# Altium PCB Demo_v1_2.PcbDoc (part 2 of 2)
Units mil, origin at the board's own origin, x right, y up, seen from the top; angles counter-clockwise.
Board outline 4921.26 x 5610.24 mil, 2 copper layers (Top Layer, Bottom Layer); 188 components, 170 nets, 730 pads, 115 vias.
Unrouted connection lines stored in the file: 12.
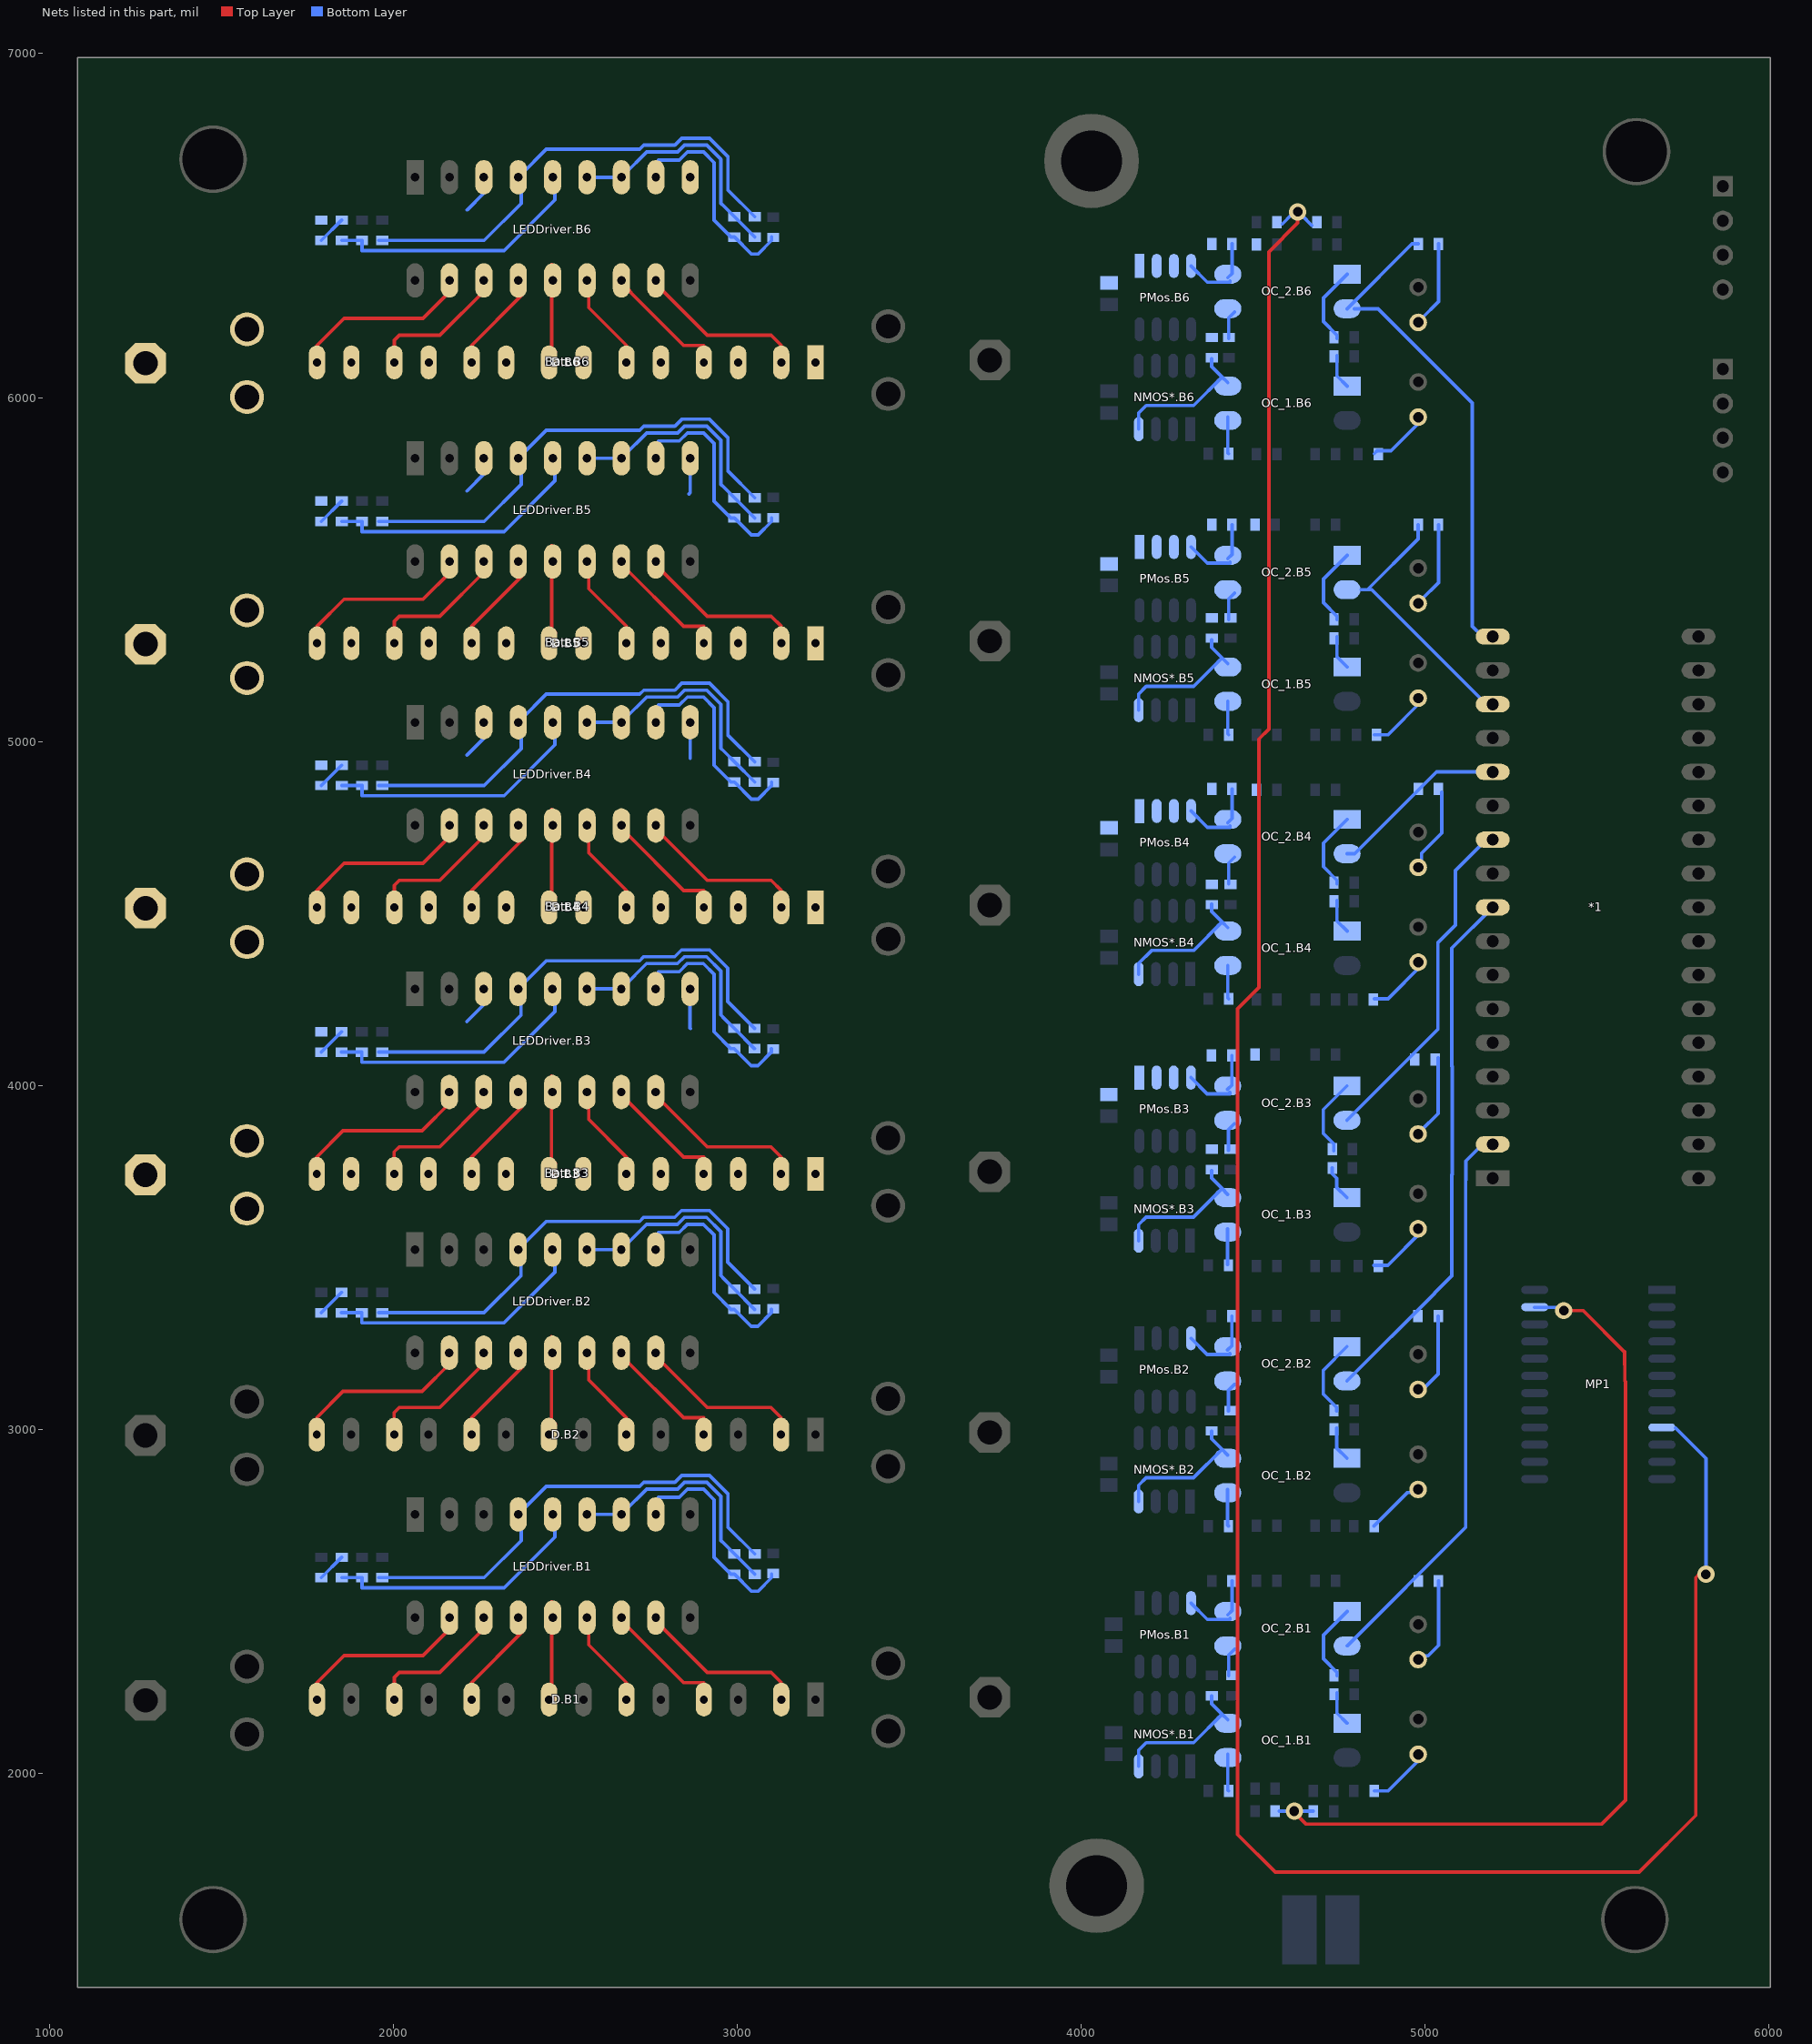
[diagram p2: the nets of this part, all layers, seen from the top]

## Via types
v1: diameter 50, hole 28, Top Layer to Bottom Layer, 115 vias

## Nets (pads, with @x,y where several pads share a name; then routed paths per layer and width w, separated by ;. In a path a pad name is that pad's centre, name@x,y a point inside that pad or via, vN(x,y) a via of type N, cw(c..) or ccw(c..) an arc to the next point about the centre after c; other vN are vias at no path point) (continued)
NetBatt.B3_P: Batt.B3.P C1.B3.2 D.B3.1 D.B3.3 D.B3.5 D.B3.7 D.B3.9 D.B3.11 D.B3.13 LEDDriver.B3.3 LEDDriver.B3.9 PMos.B3.1 R1.B3.2 R2.B3.2 R7.B3.1 R11.B3.2 | length 231.9
  Bottom Layer w10: 2214.17,4185.53 2263.31,4234.66 LEDDriver.B3.3@2263.31,4280.69 ; LEDDriver.B3.9@2863.31,4280.69 2863.31,4166.69 2865,4165
NetBatt.B4_P: Batt.B4.P C1.B4.2 D.B4.1 D.B4.3 D.B4.5 D.B4.7 D.B4.9 D.B4.11 D.B4.13 LEDDriver.B4.3 LEDDriver.B4.9 PMos.B4.1 R1.B4.2 R2.B4.2 R7.B4.1 R11.B4.2 | length 220
  Bottom Layer w10: 2214.57,4960.63 2263.7,5009.76 LEDDriver.B4.3@2263.7,5055.79 ; 2863.7,4951.3 LEDDriver.B4.9@2863.7,5055.79
NetBatt.B5_P: Batt.B5.P C1.B5.2 D.B5.1 D.B5.3 D.B5.5 D.B5.7 D.B5.9 D.B5.11 D.B5.13 LEDDriver.B5.3 LEDDriver.B5.9 PMos.B5.1 R1.B5.2 R2.B5.2 R7.B5.1 R11.B5.2 | length 220.5
  Bottom Layer w10: 2214.57,5728.35 2263.7,5777.48 LEDDriver.B5.3@2263.7,5823.5 ; 2860,5720 2863.7,5723.7 LEDDriver.B5.9@2863.7,5823.5
NetBatt.B6_P: Batt.B6.P C1.B6.2 D.B6.1 D.B6.3 D.B6.5 D.B6.7 D.B6.9 D.B6.11 D.B6.13 LEDDriver.B6.3 LEDDriver.B6.9 PMos.B6.1 R1.B6.2 R2.B6.2 R7.B6.1 R11.B6.2 | length 115.5
  Bottom Layer w10: 2214.57,6545.28 2263.7,6594.41 LEDDriver.B6.3@2263.7,6640.43
NetD1.B1_2: D1.B1.2 R22.B1.2 | length 248.8
  Bottom Layer w10: D1.B1.2@4990.16,2341.73 5009.06,2341.73 5039.37,2372.05 R22.B1.2@5039.37,2559.05
NetD1.B2_2: D1.B2.2 R22.B2.2 | length 237.7
  Bottom Layer w10: D1.B2.2@4989.76,3111.91 5038.34,3160.48 5038.34,3328.59 R22.B2.2@5038.98,3329.23
NetD1.B3_2: D1.B3.2 R22.B3.2 | length 229.9
  Bottom Layer w10: D1.B3.2@4989.76,3869.78 5038.11,3918.13 R22.B3.2@5038.11,4079.66
NetD1.B4_2: D1.B4.2 R22.B4.2 | length 232.3
  Bottom Layer w10: D1.B4.2@4990.16,4644.88 4990.16,4675.2 5048.59,4733.63 R22.B4.2@5048.59,4852.98
NetD1.B5_2: D1.B5.2 R22.B5.2 | length 237.7
  Bottom Layer w10: D1.B5.2@4990.16,5412.6 5039.37,5461.81 R22.B5.2@5039.37,5629.92
NetD1.B6_2: D1.B6.2 R22.B6.2 | length 237.7
  Bottom Layer w10: D1.B6.2@4990.16,6229.53 5039.37,6278.74 R22.B6.2@5039.37,6446.85
NetD2.B1_2: D2.B1.2 R23.B1.2 | length 178.2
  Bottom Layer w10: R23.B1.2@4852.36,1948.82 4892.52,1948.82 D2.B1.2@4990.16,2046.46
NetD2.B2_2: D2.B2.2 R23.B2.2 | length 178.2
  Bottom Layer w10: R23.B2.2@4851.97,2719 4949.61,2816.63 D2.B2.2@4989.76,2816.63
NetD2.B3_2: D2.B3.2 R23.B3.2 | length 178.2
  Bottom Layer w10: R23.B3.2@4851.97,3476.87 4892.13,3476.87 D2.B3.2@4989.76,3574.51
NetD2.B4_2: D2.B4.2 R23.B4.2 | length 178.2
  Bottom Layer w10: R23.B4.2@4852.36,4251.97 4892.52,4251.97 D2.B4.2@4990.16,4349.61
NetD2.B5_2: D2.B5.2 R23.B5.2 | length 178.2
  Bottom Layer w10: R23.B5.2@4852.36,5019.69 4892.52,5019.69 D2.B5.2@4990.16,5117.32
NetD2.B6_2: D2.B6.2 R23.B6.2 | length 178.2
  Bottom Layer w10: R23.B6.2@4852.36,5836.61 4861.42,5845.67 4901.57,5845.67 D2.B6.2@4990.16,5934.25
NetD.B1_2: D.B1.2 LEDDriver.B1.11 | length 494.5
  Top Layer w10: LEDDriver.B1.11@2762.2,2424.8 2762.2,2452.64 LEDDriver.B1.11@2762.2,2480.79 ; LEDDriver.B1.11@2763.98,2442.72 2913.39,2293.31 3098.82,2293.31 3128.35,2263.78
NetD.B1_4: D.B1.4 LEDDriver.B1.12 | length 327.4
  Top Layer w10: LEDDriver.B1.12@2663.7,2452.64 2663.7,2436.3 2675,2425 2683.27,2425 2844.49,2263.78 2903.35,2263.78
NetD.B1_6: D.B1.6 LEDDriver.B1.13 | length 252
  Top Layer w10: LEDDriver.B1.13@2568.9,2470.47 2568.9,2452.64 2568.9,2373.23 2678.35,2263.78
NetD.B1_8: D.B1.8 LEDDriver.B1.14 | length 272
  Top Layer w10: LEDDriver.B1.14@2460.63,2498.9 LEDDriver.B1.14@2460.63,2449.68 ; LEDDriver.B1.14@2470.47,2439.84 2460.69,2449.63 LEDDriver.B1.14@2460.63,2449.68 ; D.B1.8@2471.75,2245.37 2460.63,2256.5 LEDDriver.B1.14@2460.63,2449.68
NetD.B1_10: D.B1.10 LEDDriver.B1.15 | length 274.6
  Top Layer w10: 2228.35,2263.78 LEDDriver.B1.15@2374.02,2409.45 ; LEDDriver.B1.15@2362.2,2427.17 2362.2,2452.64 2362.2,2472.44 2372.05,2461.1 LEDDriver.B1.15@2372.05,2452.76
NetD.B1_12: D.B1.12 LEDDriver.B1.16 | length 397.3
  Top Layer w10: 2003.35,2263.78 2003.35,2278.62 2018.03,2293.31 2135.83,2293.31 2267.13,2424.61 2262.2,2429.53 2262.2,2452.64 LEDDriver.B1.16@2262.2,2480.79
NetD.B1_14: D.B1.14 LEDDriver.B1.17 | length 514.5
  Top Layer w10: 1778.35,2263.78 1857.09,2342.52 2086.62,2342.52 2167.13,2423.03 2162.2,2427.95 LEDDriver.B1.17@2162.2,2480.79
NetD.B2_2: D.B2.2 LEDDriver.B2.11 | length 494.5
  Top Layer w10: LEDDriver.B2.11@2761.81,3194.98 2761.81,3222.82 LEDDriver.B2.11@2761.81,3250.97 ; LEDDriver.B2.11@2763.58,3212.89 2912.99,3063.49 3098.42,3063.49 3127.95,3033.96
NetD.B2_4: D.B2.4 LEDDriver.B2.12 | length 384.7
  Top Layer w10: LEDDriver.B2.12@2661.81,3186.71 2661.81,3222.82 2661.81,3245.77 2671.65,3231.28 LEDDriver.B2.12@2671.65,3226.08 ; LEDDriver.B2.12@2671.53,3206.53 2844.09,3033.96 2902.95,3033.96
NetD.B2_6: D.B2.6 LEDDriver.B2.13 | length 252
  Top Layer w10: LEDDriver.B2.13@2568.5,3240.65 2568.5,3222.82 2568.5,3143.41 2677.95,3033.96
NetD.B2_8: D.B2.8 LEDDriver.B2.14 | length 272
  Top Layer w10: LEDDriver.B2.14@2460.24,3269.08 LEDDriver.B2.14@2460.24,3219.86 ; LEDDriver.B2.14@2470.08,3210.02 2460.29,3219.8 LEDDriver.B2.14@2460.24,3219.86 ; D.B2.8@2471.36,3015.55 2460.24,3026.67 LEDDriver.B2.14@2460.24,3219.86
NetD.B2_10: D.B2.10 LEDDriver.B2.15 | length 274.6
  Top Layer w10: 2227.95,3033.96 LEDDriver.B2.15@2373.62,3179.63 ; LEDDriver.B2.15@2361.81,3197.34 2361.81,3222.82 2361.81,3242.62 2371.65,3231.28 LEDDriver.B2.15@2371.65,3222.93
NetD.B2_12: D.B2.12 LEDDriver.B2.16 | length 397.3
  Top Layer w10: 2002.95,3033.96 2002.95,3048.8 2017.64,3063.49 2135.43,3063.49 2266.73,3194.78 2261.81,3199.71 2261.81,3222.82 LEDDriver.B2.16@2261.81,3250.97
NetD.B2_14: D.B2.14 LEDDriver.B2.17 | length 514.5
  Top Layer w10: 1777.95,3033.96 1854.23,3110.24 2083.76,3110.24 2166.73,3193.21 2161.81,3198.13 LEDDriver.B2.17@2161.81,3250.97
NetD.B3_2: D.B3.2 LEDDriver.B3.11 | length 494.5
  Top Layer w10: LEDDriver.B3.11@2761.81,3952.86 2761.81,3980.69 LEDDriver.B3.11@2761.81,4008.84 ; LEDDriver.B3.11@2763.58,3970.77 2912.99,3821.36 3098.42,3821.36 3127.95,3791.83
NetD.B3_4: D.B3.4 LEDDriver.B3.12 | length 358.7
  Top Layer w10: LEDDriver.B3.12@2661.81,3944.59 LEDDriver.B3.12@2661.81,3980.69 ; LEDDriver.B3.12@2663.31,3980.69 2675,3969 2675,3960.93 2844.09,3791.83 2902.95,3791.83
NetD.B3_6: D.B3.6 LEDDriver.B3.13 | length 252
  Top Layer w10: LEDDriver.B3.13@2568.5,3998.52 2568.5,3980.69 2568.5,3901.28 2677.95,3791.83
NetD.B3_8: D.B3.8 LEDDriver.B3.14 | length 272
  Top Layer w10: LEDDriver.B3.14@2460.24,4026.95 LEDDriver.B3.14@2460.24,3977.74 ; LEDDriver.B3.14@2470.08,3967.89 2460.29,3977.68 LEDDriver.B3.14@2460.24,3977.74 ; D.B3.8@2471.36,3773.43 2460.24,3784.55 LEDDriver.B3.14@2460.24,3977.74
NetD.B3_10: D.B3.10 LEDDriver.B3.15 | length 274.6
  Top Layer w10: 2227.95,3791.83 LEDDriver.B3.15@2373.62,3937.5 ; LEDDriver.B3.15@2361.81,3955.22 2361.81,3980.69 2361.81,4000.49 2371.65,3989.15 LEDDriver.B3.15@2371.65,3980.81
NetD.B3_12: D.B3.12 LEDDriver.B3.16 | length 397.3
  Top Layer w10: 2002.95,3791.83 2002.95,3806.67 2017.64,3821.36 2135.43,3821.36 2266.73,3952.66 2261.81,3957.58 2261.81,3980.69 LEDDriver.B3.16@2261.81,4008.84
NetD.B3_14: D.B3.14 LEDDriver.B3.17 | length 514.5
  Top Layer w10: 1777.95,3791.83 1854.23,3868.11 2083.76,3868.11 2166.73,3951.08 2161.81,3956 LEDDriver.B3.17@2161.81,4008.84
NetD.B4_2: D.B4.2 LEDDriver.B4.11 | length 494.5
  Top Layer w10: LEDDriver.B4.11@2762.2,4727.95 2762.2,4755.79 LEDDriver.B4.11@2762.2,4783.94 ; LEDDriver.B4.11@2763.98,4745.87 2913.39,4596.46 3098.82,4596.46 3128.35,4566.93
NetD.B4_4: D.B4.4 LEDDriver.B4.12 | length 387.1
  Top Layer w10: LEDDriver.B4.12@2662.2,4719.69 2662.2,4755.79 2662.2,4778.74 2672.05,4764.25 LEDDriver.B4.12@2672.05,4759.06 ; LEDDriver.B4.12@2677.17,4744.09 2677.17,4734.25 2844.49,4566.93 2903.35,4566.93
NetD.B4_6: D.B4.6 LEDDriver.B4.13 | length 252
  Top Layer w10: LEDDriver.B4.13@2568.9,4773.62 2568.9,4755.79 2568.9,4676.38 2678.35,4566.93
NetD.B4_8: D.B4.8 LEDDriver.B4.14 | length 272
  Top Layer w10: LEDDriver.B4.14@2460.63,4802.05 LEDDriver.B4.14@2460.63,4752.83 ; LEDDriver.B4.14@2470.47,4742.99 2460.69,4752.78 LEDDriver.B4.14@2460.63,4752.83 ; D.B4.8@2471.75,4548.52 2460.63,4559.65 LEDDriver.B4.14@2460.63,4752.83
NetD.B4_10: D.B4.10 LEDDriver.B4.15 | length 274.6
  Top Layer w10: 2228.35,4566.93 LEDDriver.B4.15@2374.02,4712.6 ; LEDDriver.B4.15@2362.2,4730.32 2362.2,4755.79 2362.2,4775.59 2372.05,4764.25 LEDDriver.B4.15@2372.05,4755.91
NetD.B4_12: D.B4.12 LEDDriver.B4.16 | length 397.3
  Top Layer w10: 2003.35,4566.93 2003.35,4581.77 2018.03,4596.46 2135.83,4596.46 2267.13,4727.76 2262.2,4732.68 2262.2,4755.79 LEDDriver.B4.16@2262.2,4783.94
NetD.B4_14: D.B4.14 LEDDriver.B4.17 | length 514.5
  Top Layer w10: 1778.35,4566.93 1857.09,4645.67 2086.62,4645.67 2167.13,4726.18 2162.2,4731.1 LEDDriver.B4.17@2162.2,4783.94
NetD.B5_2: D.B5.2 LEDDriver.B5.11 | length 494.5
  Top Layer w10: LEDDriver.B5.11@2762.2,5495.67 2762.2,5523.5 LEDDriver.B5.11@2762.2,5551.65 ; LEDDriver.B5.11@2763.98,5513.58 2913.39,5364.17 3098.82,5364.17 3128.35,5334.65
NetD.B5_4: D.B5.4 LEDDriver.B5.12 | length 313.8
  Top Layer w10: LEDDriver.B5.12@2662.2,5510 2669.13,5510 2844.49,5334.65 2903.35,5334.65
NetD.B5_6: D.B5.6 LEDDriver.B5.13 | length 252
  Top Layer w10: LEDDriver.B5.13@2568.9,5541.34 2568.9,5523.5 2568.9,5444.09 2678.35,5334.65
NetD.B5_8: D.B5.8 LEDDriver.B5.14 | length 272
  Top Layer w10: LEDDriver.B5.14@2460.63,5569.76 LEDDriver.B5.14@2460.63,5520.55 ; LEDDriver.B5.14@2470.47,5510.71 2460.69,5520.49 LEDDriver.B5.14@2460.63,5520.55 ; D.B5.8@2471.75,5316.24 2460.63,5327.36 LEDDriver.B5.14@2460.63,5520.55
NetD.B5_10: D.B5.10 LEDDriver.B5.15 | length 274.6
  Top Layer w10: 2228.35,5334.65 LEDDriver.B5.15@2374.02,5480.31 ; LEDDriver.B5.15@2362.2,5498.03 2362.2,5523.5 2362.2,5543.31 2372.05,5531.97 LEDDriver.B5.15@2372.05,5523.62
NetD.B5_12: D.B5.12 LEDDriver.B5.16 | length 397.3
  Top Layer w10: 2003.35,5334.65 2003.35,5349.49 2018.03,5364.17 2135.83,5364.17 2267.13,5495.47 2262.2,5500.39 2262.2,5523.5 LEDDriver.B5.16@2262.2,5551.65
NetD.B5_14: D.B5.14 LEDDriver.B5.17 | length 514.5
  Top Layer w10: 1778.35,5334.65 1857.09,5413.39 2086.62,5413.39 2167.13,5493.9 2162.2,5498.82 LEDDriver.B5.17@2162.2,5551.65
NetD.B6_2: D.B6.2 LEDDriver.B6.11 | length 494.5
  Top Layer w10: LEDDriver.B6.11@2762.2,6312.6 2762.2,6340.43 LEDDriver.B6.11@2762.2,6368.58 ; LEDDriver.B6.11@2763.98,6330.51 2913.39,6181.1 3098.82,6181.1 3128.35,6151.58
NetD.B6_4: D.B6.4 LEDDriver.B6.12 | length 321.5
  Top Layer w10: LEDDriver.B6.12@2662.2,6340.43 2662.8,6339.7 2691.73,6304.33 2844.49,6151.58 2903.35,6151.58
NetD.B6_6: D.B6.6 LEDDriver.B6.13 | length 252
  Top Layer w10: LEDDriver.B6.13@2568.9,6358.27 2568.9,6340.43 2568.9,6261.02 2678.35,6151.58
NetD.B6_8: D.B6.8 LEDDriver.B6.14 | length 272
  Top Layer w10: LEDDriver.B6.14@2460.63,6386.69 LEDDriver.B6.14@2460.63,6337.48 ; LEDDriver.B6.14@2470.47,6327.64 2460.69,6337.42 LEDDriver.B6.14@2460.63,6337.48 ; D.B6.8@2471.75,6133.17 2460.63,6144.29 LEDDriver.B6.14@2460.63,6337.48
NetD.B6_10: D.B6.10 LEDDriver.B6.15 | length 274.6
  Top Layer w10: 2228.35,6151.58 LEDDriver.B6.15@2374.02,6297.24 ; LEDDriver.B6.15@2362.2,6314.96 2362.2,6340.43 2362.2,6360.24 2372.05,6348.9 LEDDriver.B6.15@2372.05,6340.55
NetD.B6_12: D.B6.12 LEDDriver.B6.16 | length 397.3
  Top Layer w10: 2003.35,6151.58 2003.35,6166.42 2018.03,6181.1 2135.83,6181.1 2267.13,6312.4 2262.2,6317.32 2262.2,6340.43 LEDDriver.B6.16@2262.2,6368.58
NetD.B6_14: D.B6.14 LEDDriver.B6.17 | length 514.5
  Top Layer w10: 1778.35,6151.58 1857.09,6230.32 2086.62,6230.31 2167.13,6310.83 2162.2,6315.75 LEDDriver.B6.17@2162.2,6368.58
NetLEDDriver.B1_4: LEDDriver.B1.4 R14.B1.1 R16.B1.2 | length 1416.8
  Bottom Layer w10: R16.B1.2@1958.66,2568.9 R16.B1.2@1968.5,2568.9 2264.57,2568.9 2372.05,2676.37 2372.05,2761.1 2445.28,2834.33 2716.99,2834.33 2728.76,2846.1 2818.91,2846.1 2838.91,2866.1 2920.06,2866.1 2973.07,2813.09 2973.07,2715.91 R14.B1.1@3051.18,2637.8
NetLEDDriver.B1_5: LEDDriver.B1.5 R12.B1.1 R13.B1.2 | length 785.5
  Bottom Layer w10: R12.B1.1@1850.39,2568.9 R13.B1.2@1909.45,2568.9 1909.45,2539.37 2322.83,2539.37 2470.47,2687.01 2470.47,2759.53 LEDDriver.B1.5@2472.05,2761.1
NetLEDDriver.B1_6: LEDDriver.B1.6 LEDDriver.B1.7 R14.B1.2 R15.B1.2 | length 700
  Bottom Layer w10: LEDDriver.B1.6@2563.7,2752.64 LEDDriver.B1.7@2663.7,2752.64 ; LEDDriver.B1.7@2672.05,2761.1 2737.05,2826.1 2827.19,2826.1 2847.19,2846.1 2911.77,2846.1 2953.07,2804.8 2953.07,2676.85 2962.6,2667.32 R15.B1.2@2992.13,2637.8 R14.B1.2@3051.18,2578.74
NetLEDDriver.B1_8: LEDDriver.B1.8 R15.B1.1 R17.B1.2 | length 626.6
  Bottom Layer w10: LEDDriver.B1.8@2772.05,2761.1 2772.05,2802.67 2832.05,2802.67 2855.48,2826.1 2902.24,2826.1 2933.07,2795.28 2933.07,2627.95 2982.28,2578.74 R15.B1.1@2992.13,2578.74 3041.34,2529.53 3061.02,2529.53 3100.39,2568.9 R17.B1.2@3100.39,2578.74
NetLEDDriver.B2_4: LEDDriver.B2.4 R14.B2.1 R16.B2.2 | length 1416.8
  Bottom Layer w10: R16.B2.2@1958.27,3339.08 R16.B2.2@1968.11,3339.07 2264.18,3339.08 2371.65,3446.55 2371.65,3531.28 2444.88,3604.51 2716.6,3604.51 2728.37,3616.28 2818.52,3616.28 2838.52,3636.28 2919.66,3636.28 2972.68,3583.27 2972.68,3486.08 R14.B2.1@3050.79,3407.97
NetLEDDriver.B2_5: LEDDriver.B2.5 R12.B2.1 R13.B2.2 | length 785.5
  Bottom Layer w10: R12.B2.1@1850,3339.07 R13.B2.2@1909.06,3339.07 1909.05,3309.55 2322.44,3309.55 2470.08,3457.19 2470.08,3529.71 LEDDriver.B2.5@2471.65,3531.28
NetLEDDriver.B2_6: LEDDriver.B2.6 LEDDriver.B2.7 R14.B2.2 R15.B2.2 | length 700
  Bottom Layer w10: LEDDriver.B2.6@2563.31,3522.82 LEDDriver.B2.7@2663.31,3522.82 ; LEDDriver.B2.7@2671.65,3531.28 2736.65,3596.28 2826.8,3596.28 2846.8,3616.28 2911.38,3616.28 2952.68,3574.98 2952.68,3447.03 2962.2,3437.5 R15.B2.2@2991.73,3407.97 R14.B2.2@3050.79,3348.92
NetLEDDriver.B2_8: LEDDriver.B2.8 R15.B2.1 R17.B2.2 | length 626.6
  Bottom Layer w10: LEDDriver.B2.8@2771.65,3531.28 2771.65,3572.85 2831.65,3572.85 2855.08,3596.28 2901.85,3596.28 2932.68,3565.45 2932.68,3398.13 2981.89,3348.92 R15.B2.1@2991.73,3348.92 3040.94,3299.71 3060.63,3299.71 3100,3339.08 R17.B2.2@3100,3348.92
NetLEDDriver.B3_4: LEDDriver.B3.4 R14.B3.1 R16.B3.2 | length 1416.8
  Bottom Layer w10: R16.B3.2@1958.27,4096.95 R16.B3.2@1968.11,4096.95 2264.18,4096.95 2371.65,4204.42 2371.65,4289.15 2444.88,4362.38 2716.6,4362.38 2728.37,4374.15 2818.52,4374.15 2838.52,4394.15 2919.66,4394.15 2972.68,4341.14 2972.68,4243.96 R14.B3.1@3050.79,4165.85
NetLEDDriver.B3_5: LEDDriver.B3.5 R12.B3.1 R13.B3.2 | length 785.5
  Bottom Layer w10: R12.B3.1@1850,4096.95 R13.B3.2@1909.06,4096.95 1909.05,4067.42 2322.44,4067.42 2470.08,4215.06 2470.08,4287.58 LEDDriver.B3.5@2471.65,4289.15
NetLEDDriver.B3_6: LEDDriver.B3.6 LEDDriver.B3.7 R14.B3.2 R15.B3.2 | length 700
  Bottom Layer w10: LEDDriver.B3.6@2563.31,4280.69 LEDDriver.B3.7@2663.31,4280.69 ; LEDDriver.B3.7@2671.65,4289.15 2736.65,4354.15 2826.8,4354.15 2846.8,4374.15 2911.38,4374.15 2952.68,4332.85 2952.68,4204.9 2962.2,4195.37 R15.B3.2@2991.73,4165.85 R14.B3.2@3050.79,4106.79
NetLEDDriver.B3_8: LEDDriver.B3.8 R15.B3.1 R17.B3.2 | length 626.6
  Bottom Layer w10: LEDDriver.B3.8@2771.65,4289.15 2771.65,4330.72 2831.65,4330.72 2855.08,4354.15 2901.85,4354.15 2932.68,4323.33 2932.68,4156 2981.89,4106.79 R15.B3.1@2991.73,4106.79 3040.94,4057.58 3060.63,4057.58 3100,4096.95 R17.B3.2@3100,4106.79
NetLEDDriver.B4_4: LEDDriver.B4.4 R14.B4.1 R16.B4.2 | length 1416.8
  Bottom Layer w10: R16.B4.2@1958.66,4872.05 R16.B4.2@1968.5,4872.05 2264.57,4872.05 2372.05,4979.52 2372.05,5064.25 2445.28,5137.48 2716.99,5137.48 2728.76,5149.25 2818.91,5149.25 2838.91,5169.25 2920.06,5169.25 2973.07,5116.24 2973.07,5019.06 R14.B4.1@3051.18,4940.94
NetLEDDriver.B4_5: LEDDriver.B4.5 R12.B4.1 R13.B4.2 | length 785.5
  Bottom Layer w10: R12.B4.1@1850.39,4872.05 R13.B4.2@1909.45,4872.05 1909.45,4842.52 2322.83,4842.52 2470.47,4990.16 2470.47,5062.68 LEDDriver.B4.5@2472.05,5064.25
NetLEDDriver.B4_6: LEDDriver.B4.6 LEDDriver.B4.7 R14.B4.2 R15.B4.2 | length 700
  Bottom Layer w10: LEDDriver.B4.6@2563.7,5055.79 LEDDriver.B4.7@2663.7,5055.79 ; LEDDriver.B4.7@2672.05,5064.25 2737.05,5129.25 2827.19,5129.25 2847.19,5149.25 2911.77,5149.25 2953.07,5107.95 2953.07,4980 2962.6,4970.47 R15.B4.2@2992.13,4940.94 R14.B4.2@3051.18,4881.89
NetLEDDriver.B4_8: LEDDriver.B4.8 R15.B4.1 R17.B4.2 | length 626.6
  Bottom Layer w10: LEDDriver.B4.8@2772.05,5064.25 2772.05,5105.82 2832.05,5105.82 2855.48,5129.25 2902.24,5129.25 2933.07,5098.43 2933.07,4931.1 2982.28,4881.89 R15.B4.1@2992.13,4881.89 3041.34,4832.68 3061.02,4832.68 3100.39,4872.05 R17.B4.2@3100.39,4881.89
NetLEDDriver.B5_4: LEDDriver.B5.4 R14.B5.1 R16.B5.2 | length 1416.8
  Bottom Layer w10: R16.B5.2@1958.66,5639.76 R16.B5.2@1968.5,5639.76 2264.57,5639.76 2372.05,5747.24 2372.05,5831.97 2445.28,5905.2 2716.99,5905.2 2728.76,5916.97 2818.91,5916.97 2838.91,5936.97 2920.06,5936.97 2973.07,5883.95 2973.07,5786.77 R14.B5.1@3051.18,5708.66
NetLEDDriver.B5_5: LEDDriver.B5.5 R12.B5.1 R13.B5.2 | length 785.5
  Bottom Layer w10: R12.B5.1@1850.39,5639.76 R13.B5.2@1909.45,5639.76 1909.45,5610.24 2322.83,5610.24 2470.47,5757.87 2470.47,5830.39 LEDDriver.B5.5@2472.05,5831.97
NetLEDDriver.B5_6: LEDDriver.B5.6 LEDDriver.B5.7 R14.B5.2 R15.B5.2 | length 700
  Bottom Layer w10: LEDDriver.B5.6@2563.7,5823.5 LEDDriver.B5.7@2663.7,5823.5 ; LEDDriver.B5.7@2672.05,5831.97 2737.05,5896.97 2827.19,5896.97 2847.19,5916.97 2911.77,5916.97 2953.07,5875.67 2953.07,5747.72 2962.6,5738.19 R15.B5.2@2992.13,5708.66 R14.B5.2@3051.18,5649.61
NetLEDDriver.B5_8: LEDDriver.B5.8 R15.B5.1 R17.B5.2 | length 626.6
  Bottom Layer w10: LEDDriver.B5.8@2772.05,5831.97 2772.05,5873.54 2832.05,5873.54 2855.48,5896.97 2902.24,5896.97 2933.07,5866.14 2933.07,5698.82 2982.28,5649.61 R15.B5.1@2992.13,5649.61 3041.34,5600.39 3061.02,5600.39 3100.39,5639.76 R17.B5.2@3100.39,5649.61
NetLEDDriver.B6_4: LEDDriver.B6.4 R14.B6.1 R16.B6.2 | length 1416.8
  Bottom Layer w10: R16.B6.2@1958.66,6456.69 R16.B6.2@1968.5,6456.69 2264.57,6456.69 2372.05,6564.17 2372.05,6648.9 2445.28,6722.13 2716.99,6722.13 2728.76,6733.9 2818.91,6733.9 2838.91,6753.9 2920.06,6753.9 2973.07,6700.88 2973.07,6603.7 R14.B6.1@3051.18,6525.59
NetLEDDriver.B6_5: LEDDriver.B6.5 R12.B6.1 R13.B6.2 | length 785.5
  Bottom Layer w10: R12.B6.1@1850.39,6456.69 R13.B6.2@1909.45,6456.69 1909.45,6427.17 2322.83,6427.17 2470.47,6574.8 2470.47,6647.32 LEDDriver.B6.5@2472.05,6648.9
NetLEDDriver.B6_6: LEDDriver.B6.6 LEDDriver.B6.7 R14.B6.2 R15.B6.2 | length 700
  Bottom Layer w10: LEDDriver.B6.6@2563.7,6640.43 LEDDriver.B6.7@2663.7,6640.43 ; LEDDriver.B6.7@2672.05,6648.9 2737.05,6713.9 2827.19,6713.9 2847.19,6733.9 2911.77,6733.9 2953.07,6692.6 2953.07,6564.65 2962.6,6555.12 R15.B6.2@2992.13,6525.59 R14.B6.2@3051.18,6466.54
NetLEDDriver.B6_8: LEDDriver.B6.8 R15.B6.1 R17.B6.2 | length 626.6
  Bottom Layer w10: LEDDriver.B6.8@2772.05,6648.9 2772.05,6690.47 2832.05,6690.47 2855.48,6713.9 2902.24,6713.9 2933.07,6683.07 2933.07,6515.75 2982.28,6466.54 R15.B6.1@2992.13,6466.54 3041.34,6417.32 3061.02,6417.32 3100.39,6456.69 R17.B6.2@3100.39,6466.54
NetMP1_x0: MP1.9 R19.2 R21.2 | length 7531.6
  Top Layer w10: v1(4630,6540) 4630,6507.43 4545.98,6423.42 4545.98,5036.25 4517.09,5007.36 4517.09,4284.49 4455,4222.4 4455,1822.15 4564.55,1712.6 5622.46,1712.6 5787.4,1877.54 5787.4,2568.9 5797.24,2578.74 v1(5816.93,2578.74)
  Bottom Layer w10: 4585.35,6504.65 4610.71,6530 4641.26,6530 4670.63,6500.63 ; 5728.35,3004.33 5816.93,2915.75 v1(5816.93,2578.74)
NetMP1_y0: MP1.23 R18.2 R20.2 | length 2734.3
  Top Layer w10: v1(4620,1890) 4615.91,1890 4653.31,1852.6 5514.02,1852.6 5582.83,1921.42 5582.83,3138.84 5581.34,3140.34 5581.34,3184 5581.02,3184.32 5581.02,3187.73 5580.71,3188.05 5580.71,3225.86 ; v1(5403.54,3345.28) 5460.11,3345.28 5580.71,3224.68
  Bottom Layer w10: R18.2@4576.77,1889.76 R20.2@4675.2,1889.76 ; MP1.23@5318.9,3354.33 5384.65,3354.33 5393.7,3345.28 v1(5403.54,3345.28)
NetNMOS*.B1_1: NMOS*.B1.4 OC_1.B1.4 R2.B1.1 | length 421.2
  Bottom Layer w10: NMOS*.B1.4@4167.64,2020.35 4167.64,2067.2 4189.68,2089.25 4327.48,2089.25 OC_1.B1.4@4410.26,2172.03 ; R2.B1.1@4379.92,2224.41 4379.92,2202.36 OC_1.B1.4@4410.26,2172.03 ; OC_1.B1.4@4426.77,2155.51 OC_1.B1.4@4410.26,2172.03
NetNMOS*.B2_1: NMOS*.B2.4 OC_1.B2.4 R2.B2.1 | length 421.2
  Bottom Layer w10: NMOS*.B2.4@4167.24,2790.53 4167.24,2837.38 4189.29,2859.43 4327.09,2859.43 OC_1.B2.4@4409.86,2942.21 ; R2.B2.1@4379.53,2994.59 4379.53,2972.54 OC_1.B2.4@4409.86,2942.21 ; OC_1.B2.4@4426.38,2925.69 OC_1.B2.4@4409.86,2942.21
NetNMOS*.B3_1: NMOS*.B3.4 OC_1.B3.4 R2.B3.1 | length 421.2
  Bottom Layer w10: NMOS*.B3.4@4167.24,3548.41 4167.24,3595.26 4189.29,3617.3 4327.09,3617.3 OC_1.B3.4@4409.86,3700.08 ; R2.B3.1@4379.53,3752.46 4379.53,3730.41 OC_1.B3.4@4409.86,3700.08 ; OC_1.B3.4@4426.38,3683.56 OC_1.B3.4@4409.86,3700.08
NetNMOS*.B4_1: NMOS*.B4.4 OC_1.B4.4 R2.B4.1 | length 412
  Bottom Layer w10: NMOS*.B4.4@4167.64,4323.5 4167.64,4354.65 4205.39,4392.4 4327.48,4392.4 OC_1.B4.4@4410.26,4475.18 ; R2.B4.1@4379.92,4527.56 4379.92,4505.51 OC_1.B4.4@4410.26,4475.18 ; OC_1.B4.4@4426.77,4458.66 OC_1.B4.4@4410.26,4475.18
NetNMOS*.B5_1: NMOS*.B5.4 OC_1.B5.4 R2.B5.1 | length 421.2
  Bottom Layer w10: NMOS*.B5.4@4167.64,5091.22 4167.64,5138.07 4189.68,5160.12 4327.48,5160.12 OC_1.B5.4@4410.26,5242.89 ; R2.B5.1@4379.92,5295.28 4379.92,5273.23 OC_1.B5.4@4410.26,5242.89 ; OC_1.B5.4@4426.77,5226.38 OC_1.B5.4@4410.26,5242.89
NetNMOS*.B6_1: NMOS*.B6.4 OC_1.B6.4 R2.B6.1 | length 421.2
  Bottom Layer w10: NMOS*.B6.4@4167.64,5908.15 4167.64,5955 4189.68,5977.05 4327.48,5977.05 OC_1.B6.4@4410.26,6059.82 ; R2.B6.1@4379.92,6112.21 4379.92,6090.16 OC_1.B6.4@4410.26,6059.82 ; OC_1.B6.4@4426.77,6043.31 OC_1.B6.4@4410.26,6059.82
NetOC_1.B1_1: OC_1.B1.1 R4.B1.1 | length 100.8
  Bottom Layer w10: R4.B1.1@4744.09,2234.25 4744.09,2175.2 OC_1.B1.1@4773.62,2145.67
NetOC_1.B1_3: OC_1.B1.3 R6.B1.2 | length 107.7
  Bottom Layer w10: OC_1.B1.3@4426.77,2055.51 4426.77,1951.18 R6.B1.2@4429.13,1948.82
NetOC_1.B2_1: OC_1.B2.1 R4.B2.1 | length 100.8
  Bottom Layer w10: R4.B2.1@4743.7,3004.43 4743.7,2945.38 OC_1.B2.1@4773.23,2915.85
NetOC_1.B2_3: OC_1.B2.3 R6.B2.2 | length 107.7
  Bottom Layer w10: OC_1.B2.3@4426.38,2825.69 4426.38,2721.36 R6.B2.2@4428.74,2719
NetOC_1.B3_1: OC_1.B3.1 R4.B3.1 | length 104
  Bottom Layer w10: R4.B3.1@4730.47,3760 4730.47,3743.23 4743.7,3730 4743.7,3703.25 OC_1.B3.1@4773.23,3673.72
NetOC_1.B3_3: OC_1.B3.3 R6.B3.2 | length 104.3
  Bottom Layer w10: R6.B3.2@4426.38,3479.23 OC_1.B3.3@4426.38,3583.56
NetOC_1.B4_1: OC_1.B4.1 R4.B4.1 | length 100.8
  Bottom Layer w10: R4.B4.1@4744.09,4537.4 4744.09,4478.35 OC_1.B4.1@4773.62,4448.82
NetOC_1.B4_3: OC_1.B4.3 R6.B4.2 | length 97.8
  Bottom Layer w10: OC_1.B4.3@4426.77,4348.82 4426.77,4254.33 R6.B4.2@4429.13,4251.97
NetOC_1.B5_1: OC_1.B5.1 R4.B5.1 | length 100.8
  Bottom Layer w10: R4.B5.1@4744.09,5305.12 4744.09,5246.06 OC_1.B5.1@4773.62,5216.54
NetOC_1.B5_3: OC_1.B5.3 R6.B5.2 | length 97.8
  Bottom Layer w10: OC_1.B5.3@4426.77,5116.54 4426.77,5022.05 R6.B5.2@4429.13,5019.69
NetOC_1.B6_1: OC_1.B6.1 R4.B6.1 | length 100.8
  Bottom Layer w10: R4.B6.1@4744.09,6122.05 4744.09,6062.99 OC_1.B6.1@4773.62,6033.46
NetOC_1.B6_3: OC_1.B6.3 R6.B6.2 | length 107.7
  Bottom Layer w10: OC_1.B6.3@4426.77,5943.31 4426.77,5838.98 R6.B6.2@4429.13,5836.61
NetOC_2.B1_1: OC_2.B1.1 R3.B1.1 | length 231.9
  Bottom Layer w10: R3.B1.1@4744.1,2283.46 4744.1,2293.31 4704.72,2332.68 4704.72,2401.58 OC_2.B1.1@4773.62,2470.47
NetOC_2.B1_3: OC_2.B1.3 R5.B1.2 | length 84.3
  Bottom Layer w10: R5.B1.2@4429.13,2283.46 4429.13,2343.31 OC_2.B1.3@4446.46,2360.63
NetOC_2.B1_4: OC_2.B1.4 PMos.B1.4 R1.B1.1 | length 240
  Bottom Layer w10: PMos.B1.4@4320,2494.76 4367.24,2447.52 4433.39,2447.52 OC_2.B1.4@4433.39,2451.06 ; OC_2.B1.4@4426.77,2460.63 4438.98,2472.83 R1.B1.1@4438.98,2559.06
NetOC_2.B2_1: OC_2.B2.1 R3.B2.1 | length 231.9
  Bottom Layer w10: R3.B2.1@4743.7,3053.64 4743.7,3063.48 4704.33,3102.85 4704.33,3171.75 OC_2.B2.1@4773.23,3240.65
NetOC_2.B2_3: OC_2.B2.3 R5.B2.2 | length 84.3
  Bottom Layer w10: R5.B2.2@4428.74,3053.64 4428.74,3113.49 OC_2.B2.3@4446.06,3130.81
NetOC_2.B2_4: OC_2.B2.4 PMos.B2.4 R1.B2.1 | length 240
  Bottom Layer w10: PMos.B2.4@4319.61,3264.94 4366.85,3217.7 4432.99,3217.7 OC_2.B2.4@4432.99,3221.24 ; OC_2.B2.4@4426.38,3230.81 4438.58,3243.01 R1.B2.1@4438.58,3329.23
NetOC_2.B3_1: OC_2.B3.1 R3.B3.1 | length 229.8
  Bottom Layer w10: R3.B3.1@4735,3810 4735,3830.06 4704.33,3860.73 4704.33,3929.63 OC_2.B3.1@4773.23,3998.52
NetOC_2.B3_3: OC_2.B3.3 R5.B3.2 | length 84.3
  Bottom Layer w10: R5.B3.2@4428.74,3811.52 4428.74,3871.36 OC_2.B3.3@4446.06,3888.68
NetOC_2.B3_4: OC_2.B3.4 PMos.B3.4 R1.B3.1 | length 240
  Bottom Layer w10: PMos.B3.4@4319.61,4022.82 4366.85,3975.57 4432.99,3975.57 OC_2.B3.4@4432.99,3979.12 ; OC_2.B3.4@4426.38,3988.68 4438.58,4000.89 R1.B3.1@4438.58,4087.11
NetOC_2.B4_1: OC_2.B4.1 R3.B4.1 | length 231.9
  Bottom Layer w10: R3.B4.1@4744.1,4586.61 4744.1,4596.46 4704.72,4635.83 4704.72,4704.72 OC_2.B4.1@4773.62,4773.62
NetOC_2.B4_3: OC_2.B4.3 R5.B4.2 | length 84.3
  Bottom Layer w10: R5.B4.2@4429.13,4586.61 4429.13,4646.46 OC_2.B4.3@4446.46,4663.78
NetOC_2.B4_4: OC_2.B4.4 PMos.B4.4 R1.B4.1 | length 240
  Bottom Layer w10: PMos.B4.4@4320,4797.91 4367.24,4750.67 4433.39,4750.67 OC_2.B4.4@4433.39,4754.21 ; OC_2.B4.4@4426.77,4763.78 4438.98,4775.98 R1.B4.1@4438.98,4862.2
NetOC_2.B5_1: OC_2.B5.1 R3.B5.1 | length 231.9
  Bottom Layer w10: R3.B5.1@4744.1,5354.33 4744.1,5364.17 4704.72,5403.54 4704.72,5472.44 OC_2.B5.1@4773.62,5541.34
NetOC_2.B5_3: OC_2.B5.3 R5.B5.2 | length 84.3
  Bottom Layer w10: R5.B5.2@4429.13,5354.33 4429.13,5414.17 OC_2.B5.3@4446.46,5431.5
NetOC_2.B5_4: OC_2.B5.4 PMos.B5.4 R1.B5.1 | length 240
  Bottom Layer w10: PMos.B5.4@4320,5565.63 4367.24,5518.39 4433.39,5518.39 OC_2.B5.4@4433.39,5521.93 ; OC_2.B5.4@4426.77,5531.5 4438.98,5543.7 R1.B5.1@4438.98,5629.92
NetOC_2.B6_1: OC_2.B6.1 R3.B6.1 | length 231.9
  Bottom Layer w10: R3.B6.1@4744.1,6171.26 4744.1,6181.1 4704.72,6220.47 4704.72,6289.37 OC_2.B6.1@4773.62,6358.27
NetOC_2.B6_3: OC_2.B6.3 R5.B6.2 | length 84.3
  Bottom Layer w10: R5.B6.2@4429.13,6171.26 4429.13,6231.1 OC_2.B6.3@4446.46,6248.43
NetOC_2.B6_4: OC_2.B6.4 PMos.B6.4 R1.B6.1 | length 240
  Bottom Layer w10: PMos.B6.4@4320,6382.56 4367.24,6335.32 4433.39,6335.32 OC_2.B6.4@4433.39,6338.86 ; OC_2.B6.4@4426.77,6348.43 4438.98,6360.63 R1.B6.1@4438.98,6446.85
NetR11.B1_1: R11.B1.1 R12.B1.2 | length 83.5
  Bottom Layer w10: R11.B1.1@1791.34,2568.9 R12.B1.2@1850.39,2627.95
NetR11.B2_1: R11.B2.1 R12.B2.2 | length 83.5
  Bottom Layer w10: R11.B2.1@1790.95,3339.07 R12.B2.2@1850,3398.13
NetR11.B3_1: R11.B3.1 R12.B3.2 | length 83.5
  Bottom Layer w10: R11.B3.1@1790.95,4096.95 R12.B3.2@1850,4156
NetR11.B4_1: R11.B4.1 R12.B4.2 | length 83.5
  Bottom Layer w10: R11.B4.1@1791.34,4872.05 R12.B4.2@1850.39,4931.1
NetR11.B5_1: R11.B5.1 R12.B5.2 | length 83.5
  Bottom Layer w10: R11.B5.1@1791.34,5639.76 R12.B5.2@1850.39,5698.82
NetR11.B6_1: R11.B6.1 R12.B6.2 | length 83.5
  Bottom Layer w10: R11.B6.1@1791.34,6456.69 R12.B6.2@1850.39,6515.75
PCTRL1: *1.2 OC_2.B1.2 R22.B1.1 | length 1679.1
  Bottom Layer w10: OC_2.B1.2@4773.62,2370.47 5118.11,2714.96 5118.11,3724.2 5119.06,3725.15 5119.06,3780.47 5167.32,3828.74 *1.2@5196.85,3828.74 *1.2@5168.58,3828.74
PCTRL2: *1.9 OC_2.B2.2 R22.B2.1 | length 1553.2
  Bottom Layer w10: OC_2.B2.2@4773.23,3140.65 5029.21,3396.63 5029.21,3397.26 5078.11,3446.16 5078.11,3740.77 5079.06,3741.72 5079.06,4055.12 5078.31,4055.87 5078.31,4399.17 *1.9@5196.85,4517.72
PCTRL3: *1.11 OC_2.B3.2 R22.B3.1 | length 1002.3
  Bottom Layer w10: OC_2.B3.2@4773.23,3898.52 5037.34,4162.64 5037.34,4414.78 5088.58,4466.02 5088.58,4558.33 5088.9,4558.64 5088.9,4625.06 5178.41,4714.57 *1.11@5196.85,4714.57
PCTRL4: *1.13 OC_2.B4.2 R22.B4.1 | length 521.7
  Bottom Layer w10: OC_2.B4.2@4773.62,4673.62 4795.67,4673.62 5033.47,4911.42 *1.13@5196.85,4911.42
PCTRL5: *1.15 OC_2.B5.2 R22.B5.1 | length 771.5
  Bottom Layer w10: 4814.57,5441.34 4832.68,5441.34 ; R22.B5.1@4980.31,5629.92 4980.31,5588.98 4832.68,5441.34 ; *1.15@5182.71,5103.97 4845.34,5441.34 4832.68,5441.34 ; *1.15@5187.01,5118.11 *1.15@5196.85,5108.27
PCTRL6: *1.17 OC_2.B6.2 R22.B6.1 | length 1462.1
  Bottom Layer w10: OC_2.B6.2@4773.62,6258.27 4962.2,6446.85 R22.B6.1@4980.31,6446.85 ; OC_2.B6.2@4794.88,6258.27 4863.78,6258.27 5137.8,5984.25 5137.8,5334.65 5167.32,5305.12 *1.17@5196.85,5305.12
pads on no net: *1.6 *1.18 *1.19 *1.20 *1.26 *1.27 *1.28 *1.29 *1.30 *1.33 *1.34 LEDDriver.B1.1 LEDDriver.B1.10 LEDDriver.B1.18 LEDDriver.B2.1 LEDDriver.B2.10 LEDDriver.B2.18 LEDDriver.B3.1 LEDDriver.B3.10 LEDDriver.B3.18 LEDDriver.B4.1 LEDDriver.B4.10 LEDDriver.B4.18 LEDDriver.B5.1 LEDDriver.B5.10 LEDDriver.B5.18 LEDDriver.B6.1 LEDDriver.B6.10 LEDDriver.B6.18 MP1.2 MP1.15

## Polygon pours and split planes (outlines as drawn)
B_OUT6 on Top Layer "B_OUT6_L01_P079" (solid, pour order 79): 3651.97,6929.13 4429.13,6929.13 4429.13,5809.53 3651.97,5809.53
B_IN6 on Top Layer "B_IN6_L01_P077" (solid, pour order 77): 3651.57,6186.84 3652.83,6185.58 3847.95,6185.58 3847.95,5996.54 4153.07,5996.54 4153.07,5041.82 3651.97,5041.82
B_IN5 on Top Layer "B_IN5_L01_P075" (solid, pour order 75): 3651.57,5369.91 3652.83,5368.65 3847.95,5368.65 3847.95,5179.61 4153.07,5179.61 4153.07,4224.89 3651.97,4224.89
B_IN4 on Top Layer "B_IN4_L01_P073" (solid, pour order 73): 3651.57,4602.19 3652.83,4600.94 3847.95,4600.94 3847.95,4411.9 4153.07,4411.9 4153.07,3457.17 3651.97,3457.17
B_IN3 on Top Layer "B_IN3_L01_P071" (solid, pour order 71): 3651.57,3824.63 3652.83,3823.38 3847.95,3823.38 3847.95,3634.34 4153.07,3634.34 4153.07,2679.61 3651.97,2679.61
B_IN2 on Top Layer "B_IN2_L01_P069" (solid, pour order 69): 3652.05,3064.31 3653.3,3063.06 3848.43,3063.06 3848.43,2874.02 4153.54,2874.02 4153.54,1919.29 3652.44,1919.29
B_IN1 on Top Layer "B_IN1_L01_P067" (solid, pour order 67): 3652.31,2295.75 3653.56,2294.5 3848.69,2294.5 3848.69,2105.46 4419.29,2105.46 4419.29,1437.01 3652.61,1437.01
+5 on Top Layer "+5_L01_P065" (solid, pour order 65): 4576.77,6791.34 5954.72,6791.34 5954.72,1683.07 4576.77,1683.07
NetBatt.B1_P on Bottom Layer "NETBATT.B1_P_L02_P059" (solid, pour order 59): 4547.24,1919.29 4547.24,2667.32 1187.72,2667.32 1187.72,1919.29
B_IN1 on Bottom Layer "B_IN1_L02_P053" (solid, pour order 53): 3661.42,2294.13 4551.34,2294.13 4551.34,1437.01 3661.42,1437.01
NetBatt.B6_P on Bottom Layer "NETBATT.B6_P_L02_P063" (solid, pour order 63): 4547.24,5757.87 4547.24,6791.34 1187.72,6791.34 1187.72,5757.87
B_IN6 on Bottom Layer "B_IN6_L02_P057" (solid, pour order 57): 3652.44,6181.93 4551.34,6181.93 4551.34,5757.87 3652.44,5757.87
NetBatt.B5_P on Bottom Layer "NETBATT.B5_P_L02_P062" (solid, pour order 62): 4547.24,4990.16 4547.24,5738.19 1187.72,5738.19 1187.72,4990.16
B_IN5 on Bottom Layer "B_IN5_L02_P056" (solid, pour order 56): 3652.44,5365 4551.34,5365 4551.34,4990.16 3652.44,4990.16
NetBatt.B4_P on Bottom Layer "NETBATT.B4_P_L02_P061" (solid, pour order 61): 4547.24,4212.6 4547.24,4970.47 1187.72,4970.47 1187.72,4212.6
B_IN4 on Bottom Layer "B_IN4_L02_P055" (solid, pour order 55): 3652.44,4597.28 4551.34,4597.28 4551.34,4212.6 3652.44,4212.6
NetBatt.B3_P on Bottom Layer "NETBATT.B3_P_L02_P060" (solid, pour order 60): 4546.85,3454.72 4546.85,4195.37 1187.32,4195.37 1187.32,3454.72
B_IN3 on Bottom Layer "B_IN3_L02_P054" (solid, pour order 54): 3652.05,3822.19 4550.95,3822.19 4550.95,3454.72 3652.05,3454.72
NetBatt.B2_P on Bottom Layer "NETBATT.B2_P_L02_P058" (solid, pour order 58): 4546.85,2689.47 4546.85,3437.5 1187.32,3437.5 1187.32,2689.47
B_IN2 on Bottom Layer "B_IN2_L02_P052" (solid, pour order 52): 3652.05,3064.31 4550.94,3064.31 4550.94,2689.47 3652.05,2689.47
GND on Bottom Layer "GND_L02_P064" (solid, pour order 64): 4576.77,6791.34 5964.57,6791.34 5964.57,1692.91 4576.77,1692.91
B_OUT6 on Bottom Layer "B_OUT6_L02_P051" (solid, pour order 51): 4347.17,6018.39 4347.17,6293.98 3956.69,6293.98 3956.69,5998.7 4347.17,5998.7
B_IN6 on Bottom Layer "B_IN6_L02_P050" (solid, pour order 50): 4347.17,5201.46 4347.17,5477.05 3956.34,5477.05 3956.34,5181.77 4347.17,5181.77
B_IN5 on Bottom Layer "B_IN5_L02_P049" (solid, pour order 49): 4347.17,4433.74 4347.17,4709.33 3956.34,4709.33 3956.34,4414.06 4347.17,4414.06
B_IN4 on Bottom Layer "B_IN4_L02_P048" (solid, pour order 48): 4346.77,3658.64 4346.77,3934.23 3956.69,3934.23 3956.69,3638.96 4346.77,3638.96
B_IN3 on Bottom Layer "B_IN3_L02_P047" (solid, pour order 47): 4346.77,2900.77 4346.77,3176.36 3966.14,3176.36 3966.14,2881.08 4346.77,2881.08
B_IN2 on Bottom Layer "B_IN2_L02_P046" (solid, pour order 46): 4347.17,2130.59 4347.17,2406.18 3956.69,2406.18 3956.69,2086.61 4347.17,2086.61

## Keep-outs
Keep-Out Layer:
  lines w10: 1240.16,6988.19 5807.09,6988.19 cw(c5807.09,6791.34) 6003.94,6791.34 6003.94,1574.8 cw(c5807.09,1574.8) 5807.09,1377.95 1279.53,1377.95 cw(c1279.53,1574.8) 1082.68,1574.8 1082.68,6791.34 cw(c1279.53,6791.34) 1279.53,6988.19

## Silkscreen, mask and mechanical layers (free items; w line width, h text height)
Top Overlay:
  lines w30: 4222.44,3464.57 4980.31,3464.57 4980.31,3553.15 ; 4222.44,4074.8 4980.31,4074.8 4980.31,4003.94 ; 4224.87,1929.13 4982.74,1929.13 4982.74,2017.72 ; 4224.87,2539.37 4982.74,2539.37 4982.74,2468.5 ; 4224.87,2706.69 4982.74,2706.69 4982.74,2795.28 ; 4224.87,3316.93 4982.74,3316.93 4982.74,3246.06 ; 4224.87,4242.13 4982.74,4242.13 4982.74,4330.71 ; 4224.87,4852.36 4982.74,4852.36 4982.74,4781.5 ; 4224.87,5009.84 4982.74,5009.84 4982.74,5098.43 ; 4224.87,5620.08 4982.74,5620.08 4982.74,5549.21 ; 4224.87,5826.77 4982.74,5826.77 ; 4224.87,6437.01 4982.74,6437.01 4982.74,6366.14 ; 4940.94,4242.13 5403.54,4242.13 ; 4943.37,1929.13 5413.39,1929.13 5413.39,1754.39 ; 4943.37,3464.57 5425.65,3464.57 5425.65,3021.65 4992.58,3021.65 4982.74,3011.81 ; 4953.21,5009.84 5425.65,5009.84 5425.65,4557.09 4992.58,4557.09 4982.74,4547.24 ; 4963.06,2706.69 5425.65,2706.69 5425.65,2244.09 4992.58,2244.09 4982.74,2234.25 ; 4980.31,3708.66 4980.31,3838.58 ; 4980.31,3769.68 4990.16,3779.53 5423.23,3779.53 5423.23,4242.13 ; 4982.74,2173.23 4982.74,2303.15 ; 4982.74,2950.79 4982.74,3080.71 ; 4982.74,4486.22 4982.74,4616.14 ; 4982.74,5253.94 4982.74,5383.86 ; 4982.74,5314.96 4992.58,5324.8 5425.65,5324.8 5425.65,5826.77 4982.74,5826.77 ; 4982.74,5915.35 4982.74,5826.77 ; 4982.74,6070.87 4982.74,6200.79 ; 4982.74,6131.89 4992.58,6141.73 5425.65,6141.73 5425.65,6584.65
  lines w47.6: 1154.58,3524.17 ccw(c1218.05,3524.17) 1218.05,3460.7 ; 1154.58,3991.65 cw(c1218.05,3991.65) 1218.05,4055.12 4074.8,4055.12 ; 1155.58,3524.17 1155.58,3991.65 ; 1157.01,1988.74 ccw(c1220.47,1988.74) 1220.47,1925.27 ; 1157.01,2456.22 cw(c1220.47,2456.22) 1220.47,2519.68 4077.23,2519.68 ; 1157.01,2766.29 ccw(c1220.47,2766.29) 1220.47,2702.83 ; 1157.01,3233.78 cw(c1220.47,3233.78) 1220.47,3297.24 4077.23,3297.24 ; 1157.01,4301.73 ccw(c1220.47,4301.73) 1220.47,4238.26 ; 1157.01,4769.21 cw(c1220.47,4769.21) 1220.47,4832.68 4077.23,4832.68 ; 1157.01,5069.44 ccw(c1220.47,5069.44) 1220.47,5005.98 ; 1157.01,5536.93 cw(c1220.47,5536.93) 1220.47,5600.39 4077.23,5600.39 ; 1157.01,5886.37 ccw(c1220.47,5886.37) 1220.47,5822.91 ; 1157.01,6353.86 cw(c1220.47,6353.86) 1220.47,6417.32 4077.23,6417.32 ; 1158.01,1988.74 1158.01,2456.22 ; 1158.01,2766.29 1158.01,3233.78 ; 1158.01,4301.73 1158.01,4769.21 ; 1158.01,5069.44 1158.01,5536.93 ; 1158.01,5886.37 1158.01,6353.86 ; 1218.05,3461.7 4074.8,3461.7 ; 1220.47,1926.27 4077.23,1926.27 ; 1220.47,2703.83 4077.23,2703.83 ; 1220.47,4239.26 4077.23,4239.26 ; 1220.47,5006.98 4077.23,5006.98 ; 1220.47,5823.91 4077.23,5823.91 ; 4074.8,3460.7 ccw(c4074.8,3524.17) 4138.27,3524.17 4138.27,3992.65 ccw(c4074.8,3992.65) 4074.8,4056.12 ; 4077.23,1925.27 ccw(c4077.23,1988.74) 4140.69,1988.74 4140.69,2457.22 ccw(c4077.23,2457.22) 4077.23,2520.68 ; 4077.23,2702.83 ccw(c4077.23,2766.29) 4140.69,2766.29 4140.69,3234.78 ccw(c4077.23,3234.78) 4077.23,3298.24 ; 4077.23,4238.26 ccw(c4077.23,4301.73) 4140.69,4301.73 4140.69,4770.21 ccw(c4077.23,4770.21) 4077.23,4833.68 ; 4077.23,5005.98 ccw(c4077.23,5069.44) 4140.69,5069.44 4140.69,5537.93 ccw(c4077.23,5537.93) 4077.23,5601.39 ; 4077.23,5822.91 ccw(c4077.23,5886.37) 4140.69,5886.37 4140.69,6354.86 ccw(c4077.23,6354.86) 4077.23,6418.32 ; 4231.96,3664.71 4231.96,3867.72 ; 4234.39,2129.28 4234.39,2332.29 ; 4234.39,2906.84 4234.39,3109.85 ; 4234.39,4442.27 4234.39,4645.28 ; 4234.39,5209.99 4234.39,5413 ; 4234.39,6026.92 4234.39,6229.93
  text "Include" at 4480.77,6299.21 h60
  text "Bypass" at 4490.62,5994.09 h60
  text "Include" at 4480.77,5482.28 h60
  text "Bypass" at 4490.62,5177.17 h60
  text "Include" at 4480.77,4714.57 h60
  text "Bypass" at 4490.62,4409.45 h60
  text "Include" at 4478.35,3937.01 h60
  text "Bypass" at 4488.19,3631.89 h60
  text "Include" at 4480.77,3179.13 h60
  text "Bypass" at 4490.62,2874.02 h60
  text "Include" at 4480.77,2401.57 h60
  text "Bypass" at 4490.62,2096.46 h60
Bottom Overlay:
  text "I2C" at 5748.03,6692.91 h60
  text "Serial" at 5590.55,6181.1 h60
  text "Diff_ADC" at 4840,1585 h60